# Altium PCB PCB1.PcbDoc (part 2 of 2)
Units mm, origin at the board's own origin, x right, y up, seen from the top; angles counter-clockwise.
Board outline 158 x 54 mm, 2 copper layers (Top Layer, Bottom Layer); 125 components, 171 nets, 620 pads, 107 vias.
Unrouted connection lines stored in the file: 178.
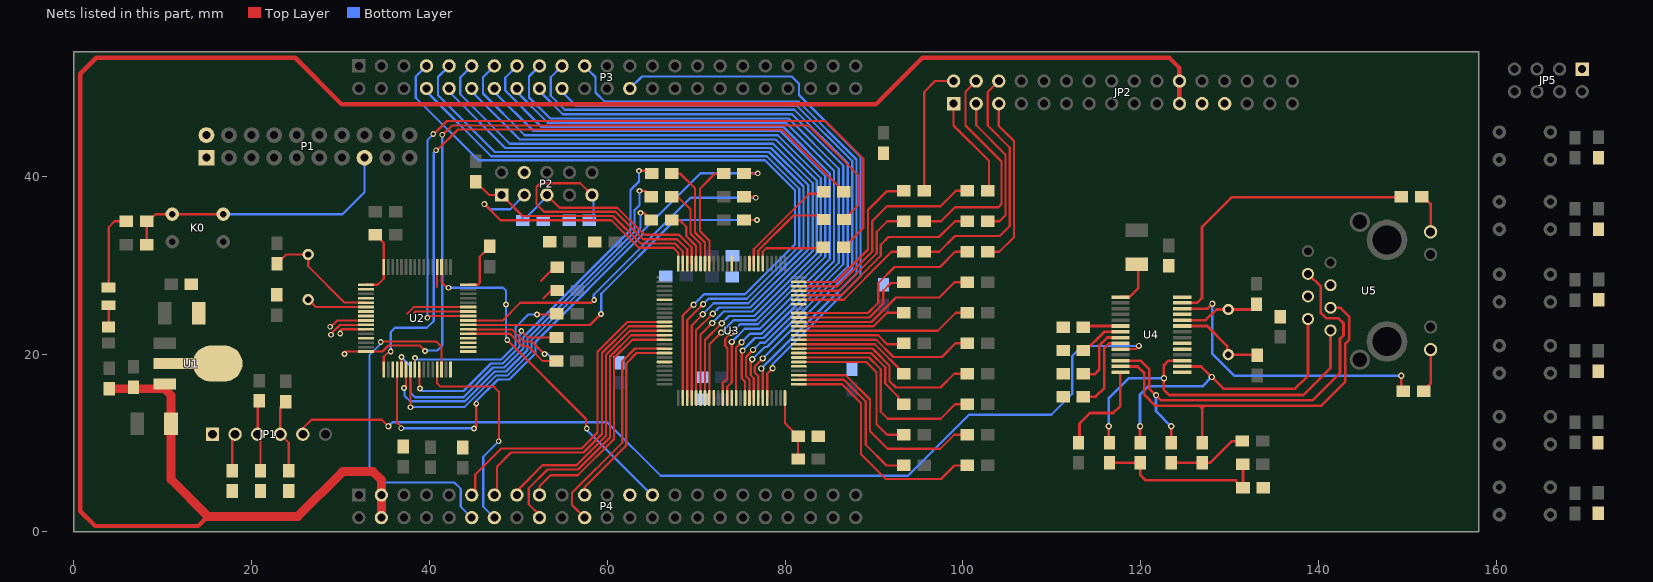
[diagram p2: the nets of this part, all layers, seen from the top]

## Via types
v1: diameter 0.7, hole 0.4, Top Layer to Bottom Layer, 59 vias
v2: diameter 0.65, hole 0.35, Top Layer to Bottom Layer, 48 vias

## Nets (pads, with @x,y where several pads share a name; then routed paths per layer and width w, separated by ;. In a path a pad name is that pad's centre, name@x,y a point inside that pad or via, vN(x,y) a via of type N, cw(c..) or ccw(c..) an arc to the next point about the centre after c; other vN are vias at no path point) (continued)
LCD_DATA14: JP2.5 R50.1 | length 18.6
  Top Layer w0.254: 103.576,31.495 104.085,31.495 105.73,33.14 105.73,43.95 104.03,45.65 JP2.5@104.03,48.155
LCD_DATA15: JP2.6 R51.1 | length 28.7
  Top Layer w0.254: R51.1@95.646,31.495 97.345,31.495 99.11,33.26 104.14,33.26 105.27,34.39 105.27,43.21 102.79,45.69 102.79,49.455 JP2.6@104.03,50.695
LCD_DE: JP2.3 R52.1 | length 15.4
  Top Layer w0.254: JP2.3@101.49,48.155 101.49,45.73 104.8,42.42 104.8,35.61 104.116,34.926 103.576,34.926
LCD_HSYNC: JP2.4 R53.1 | length 25.5
  Top Layer w0.254: R53.1@95.646,34.926 97.526,34.926 99.12,36.52 103.99,36.52 104.34,36.87 104.34,41.65 100.29,45.7 100.29,49.495 JP2.4@101.49,50.695
LCD_PLCK: JP2.1 R54.1 | length 11.4
  Top Layer w0.254: JP2.1@98.95,48.155 98.95,45.71 102.92,41.74 R54.1@102.92,38.358
LCD_VSYNC: JP2.2 R55.1 | length 14.9
  Top Layer w0.254: R55.1@95.646,38.358 95.646,49.476 96.865,50.695 JP2.2@98.95,50.695
NetC8_1: C8.1 U2.6 Y1.1 | length 7.6
  Top Layer w0.25: 27.21,25.28 U2.6@32.87,25.28
  Top Layer w0.254: C8.1@22.84,26.67 C8.1@23.39,26.12 ; Y1.1@26.37,26.12 27.21,25.28
NetC11_2: C11.2 U2.5 Y1.2 | length 13.5
  Top Layer w0.24: 26.37,29.86 30.45,25.78 U2.5@32.87,25.78
  Top Layer w0.254: C11.2@22.87,30.164 23.906,31.2 Y1.2@26.37,31.2 26.37,29.86
NetC13_1: C13.1 U4.1 | length 5.2
  Top Layer w0.3: U4.1@117.705,26.405 118.725,26.405 119.71,27.39 119.71,29.959 C13.1@119.565,30.105
NetC14_1: C14.1 U4.24 Y2.1 | length 9.1
  Top Layer w0.3: U4.24@124.655,23.805 127.295,23.805 128.5,25.01 132.41,25.01 C14.1@133.01,25.61
NetC15_1: C15.1 U4.23 Y2.2 | length 10.5
  Top Layer w0.3: U4.23@124.43,23.11 124.475,23.155 127.475,23.155 129.72,20.91 129.72,20.05 Y2.2@129.84,19.93 133.03,19.93 C15.1@133.09,19.87
NetC25_2: C25.2 L1.2 R38.1 R39.1 | length 19.6
  Top Layer w0.3: R38.1@116.473,7.758 R39.1@119.948,7.758 119.948,6.402 120.56,5.79 130.673,5.79 L1.2@131.496,4.968 131.496,7.548 C25.2@131.454,7.59
NetC26_2: C26.2 R40.1 R41.1 | length 9
  Top Layer w0.3: R41.1@123.423,7.758 126.658,7.758 126.67,7.77 127.8,7.77 130.24,10.21 C26.2@131.424,10.21
NetJP1_2: JP1.2 R14.1 | length 4.2
  Top Layer w0.254: R14.1@17.832,6.882 17.832,10.662 JP1.2@18.15,10.98
NetLED1_1: LED1.1 R67.1 | length 2.5
  Top Layer w0.3: LED1.1@3.91,23.04 3.93,23.06 R67.1@3.93,25.49
NetR5_1: R5.1 U2.36 | length 0.1
  Top Layer w0.254: R5.1@111.013,20.337 R5.1@111.06,20.29
NetR6_1: R6.1 U2.35 | length 0.1
  Top Layer w0.254: R6.1@111.186,22.94 R6.1@111.258,23.012
NetR7_2: R7.2 U2.16 | length 90.9
  Top Layer w0.24: v2(30.46,20.01) 30.369,20.101 30.549,20.28 U2.16@32.87,20.28 34.73,20.28 35.41,20.96 38.91,20.96 v2(39.52,20.35) ; v2@41.48,44.63 42.557,45.707 82.623,45.707 88.28,40.05 88.28,36.783 R7.2@86.624,35.127
  Bottom Layer w0.24: v2@39.52,20.41 40.91,20.41 41.45,20.95 v2(41.45,44.66)
NetR8_1: R8.1 U2.34 | length 0.1
  Top Layer w0.254: R8.1@111.209,17.733 R8.1@111.258,17.782
NetR9_2: R9.2 U2.17 | length 79.1
  Top Layer w0.254: U2.17@34.87,18.28 34.87,19.69 35.55,20.37 35.58,20.37 v2(35.66,20.29) ; v2(40.76,42.91) 40.76,42.88 40.83,42.88 43.21,45.26 79.617,45.26 R9.2@86.614,38.262
  Bottom Layer w0.254: v2@35.64,20.31 v2(35.66,20.29) 35.66,22.48 36.13,22.95 39.71,22.95 40.48,23.72 40.48,42.63 v2(40.76,42.91)
NetR10_1: R10.1 U2.33 | length 0.1
  Top Layer w0.254: R10.1@111.196,15.13 R10.1@111.258,15.192
NetR11_2: R11.2 U2.20 | length 63.2
  Top Layer w0.254: U2.20@36.37,18.28 36.37,12.29 v2@36.824,11.836 ; v2@45.236,11.836 45.28,11.88 v2(45.28,14.42) ; R11.2@75.868,39.81 R11.2@75.38,40.298 76.942,40.298 v2(76.92,40.32)
  Bottom Layer w0.254: v2(36.83,11.65) v2@45,11.65 ; v2@45.27,14.42 v2(45.28,14.42) 45.28,14.718 47.711,17.149 48.98,17.149 51.921,20.09 51.921,21.359 63.947,33.385 63.947,33.767 70.5,40.32 v2(76.92,40.32)
  other v2: 45.02,11.63
NetR15_2: R15.2 U2.21 | length 48
  Top Layer w0.24: U2.21@36.87,18.28 v2@36.87,19.66
  Top Layer w0.254: v2(63.57,40.6) 64.683,40.6 R15.2@64.986,40.298 R15.2@64.818,40.298
  Bottom Layer w0.254: v2(36.85,19.66) 37.87,18.64 37.87,15.647 38.38,15.137 43.773,15.137 ; 43.824,15.148 47.159,18.483 48.427,18.483 50.587,20.643 50.587,21.911 62.613,33.937 62.613,38.433 63.57,39.39 v2(63.57,40.6)
NetR16_2: R16.2 U2.22 | length 44.4
  Top Layer w0.24: v2(37.16,16.17) 37.37,16.38 U2.22@37.37,18.28 ; v2(63.62,38.35) 64.303,38.35 R16.2@64.966,37.688
  Top Layer w0.254: R16.2@64.49,37.3 R16.2@64.78,37.59
  Bottom Layer w0.24: v2@37.21,15.96 37.21,15.32 37.84,14.69 43.993,14.69 ; 44.013,14.705 47.344,18.036 48.613,18.036 51.034,20.457 51.034,21.726 63.06,33.752 63.06,36.16 63.62,36.72 v2(63.62,38.35)
NetR17_2: R17.2 U2.23 | length 42.4
  Top Layer w0.24: v2@37.87,14.336 U2.23@37.87,18.28 ; v2(63.74,35.88) 64.131,35.88 R17.2@64.946,35.065
  Bottom Layer w0.24: v2(37.87,14.02) 37.91,14.06 43.99,14.06 47.526,17.596 48.795,17.596 51.474,20.275 51.474,21.544 63.5,33.57 63.5,33.952 63.74,34.192 v2(63.74,35.88)
NetR18_2: R18.2 U2.41 | length 87.1
  Top Layer w0.24: v2(39.77,24.08) 39.77,24.274 39.776,24.28 U2.41@44.37,24.28
  Top Layer w0.254: v2@40.58,44.8 41.988,46.208 84.522,46.208 88.781,41.949 88.781,34.179 R18.2@86.594,31.992
  Bottom Layer w0.24: v2(39.77,24.08) 39.77,44.06 v2(40.44,44.73)
NetR19_2: R19.2 U2.8
NetR20_2: R20.2 U2.9 | length 4
  Top Layer w0.24: v2@29.11,23.22 29.67,23.78 U2.9@32.87,23.78
  other v2: 28.84,23.07
NetR21_2: R21.2 U2.10 | length 6.7
  Top Layer w0.24: v2@29.056,22.374 29.95,23.268 29.95,23.28 U2.10@32.87,23.28 ; 52.55,28.24 54.078,29.768 R21.2@54.396,29.768
  other v2: 28.94,22.17
NetR22_2: R22.2 U2.11 | length 5.2
  Top Layer w0.254: v2(29.98,22.32) 29.98,22.63 30.13,22.78 U2.11@32.87,22.78 ; 52.84,26.27 53.718,27.148 R22.2@54.366,27.148
NetR23_2: R23.2 U2.24 | length 20.7
  Top Layer w0.24: U2.24@38.37,18.28 v2(38.37,19.572) ; v2(52.09,24.45) 54.278,24.45 R23.2@54.346,24.518
  Bottom Layer w0.24: v2(38.37,19.572) 38.572,19.37 48.06,19.37 49.7,21.01 49.7,22.338 49.695,22.343 49.695,23.015 51.13,24.45 v2(52.09,24.45)
NetR24_2: R24.2 U2.25 | length 21.7
  Top Layer w0.24: v2@38.87,16.13 U2.25@38.87,18.28 ; v2(50.34,22.61) 50.31,22.61 51.072,21.848 R24.2@54.296,21.848
  Bottom Layer w0.24: v2(38.94,16.13) 39.23,15.84 43.84,15.84 46.93,18.93 48.242,18.93 50.14,20.828 50.14,22.14 50.34,22.34 v2(50.34,22.61)
NetR25_2: R25.2 U2.37 | length 10.6
  Top Layer w0.24: U2.37@44.37,22.28 44.373,22.277 49.062,22.277 50.443,20.896 51.045,20.896 52.734,19.208 R25.2@53.7,19.208
NetR26_2: R26.2 U2.38 | length 11.6
  Top Layer w0.24: U2.38@44.37,22.78 44.376,22.774 47.425,22.774 47.428,22.771 49.267,22.771 50.648,21.39 51.54,21.39 v2(52.93,20)
  Bottom Layer w0.254: v2(52.93,20) 52.93,20.05 52.88,20.1 53.22,20.1 54.108,19.212 R26.2@54.296,19.212
NetR27_2: R27.2 U2.39 | length 40.1
  Top Layer w0.24: U2.39@44.37,23.28 U2.39@44.37,23.28 47.628,23.279 47.635,23.272
  Top Layer w0.254: 47.635,23.272 58.052,23.272 v2(59.29,24.51) ; R27.2@75.38,35.065 v2(76.835,35.065)
  Bottom Layer w0.254: v2@59.34,24.51 59.34,26.78 67.625,35.065 v2(76.835,35.065)
NetR28_2: R28.2 U2.40 | length 40.3
  Top Layer w0.24: U2.40@44.37,23.78 46.47,23.78
  Top Layer w0.254: 46.47,23.78 48.25,23.78 50.232,25.762 58.202,25.762 v2(58.53,26.09) ; R28.2@75.792,38.1 R28.2@75.38,37.688 76.582,37.688 v2(76.7,37.57)
  Bottom Layer w0.254: v2@58.47,26.15 58.47,26.678 69.362,37.57 v2(76.7,37.57)
NetR29_1: R29.1 U4.27 | length 34.3
  Top Layer w0.3: U4.27@124.655,25.755 126.345,25.755 126.88,26.29 126.88,34.31 130.19,37.62 149.226,37.62 R29.1@149.308,37.702
NetR29_2: R29.2 U5.12 | length 4.1
  Top Layer w0.3: R29.2@151.93,37.53 152.59,36.87 U5.12@152.59,33.745
NetR30_1: R30.1 U4.26 | length 33.4
  Top Layer w0.3: U4.26@124.655,25.105 127.505,25.105 v1(128.05,25.65) ; R30.1@149.13,15.73 149.3,15.9 v1(149.3,17.55)
  Bottom Layer w0.3: v1(128.05,25.65) 128.05,20.02 130.52,17.55 v1(149.3,17.55)
NetR30_2: R30.2 U5.9 | length 5.3
  Top Layer w0.3: R30.2@151.46,15.79 151.72,15.79 152.59,16.66 U5.9@152.59,20.495
NetR31_2: R31.2 U4.14 | length 11.9
  Top Layer w0.3: R31.2@113.29,9.61 113.1,9.8 113.1,12.19 114.27,13.36 116.89,13.36 117.705,14.175 U4.14@117.705,17.955
NetR32_2: R32.2 U3.76 | length 27.3
  Top Layer w0.254: U3.76@81.54,16.61 86.4,16.61 88.55,14.46 88.55,8.74 91.33,5.96 97.52,5.96 99.038,7.478 R32.2@100.49,7.478
NetR33_2: R33.2 U3.77 | length 18.7
  Top Layer w0.254: U3.77@81.54,17.11 86.62,17.11 89.07,14.66 89.07,9.81 91.402,7.478 R33.2@93.36,7.478
NetR34_2: R34.2 U3.78 | length 25.1
  Top Layer w0.254: U3.78@81.54,17.61 86.83,17.61 89.55,14.89 89.55,11.32 91.51,9.36 97.46,9.36 99.009,10.909 R34.2@100.49,10.909
NetR35_2: R35.2 U3.81 | length 18.6
  Top Layer w0.254: U3.81@81.54,19.11 89.12,19.11 90.29,17.94 90.29,12.09 91.471,10.909 R35.2@93.36,10.909
NetR36_2: R36.2 U3.82 | length 25.3
  Top Layer w0.254: U3.82@81.54,19.61 89.45,19.61 90.77,18.29 90.77,13.5 91.54,12.73 97.51,12.73 99.12,14.34 R36.2@100.49,14.34
NetR37_2: R37.2 U3.83 | length 15.1
  Top Layer w0.254: U3.83@81.54,20.11 89.67,20.11 91.27,18.51 91.27,16.68 92.74,15.21 R37.2@92.74,14.53 ; R37.2@93.252,14.34 R37.2@93.36,14.34
NetR38_2: R38.2 U4.17 U5.1 | length 41.6
  Top Layer w0.3: v1(116.41,11.87) 116.41,10.107 R38.2@116.473,10.044 ; U4.17@124.655,19.255 123.115,19.255 122.6,18.74 122.6,15.98 123.19,15.39 138.29,15.39 141.34,18.44 U5.1@141.34,22.66
  Bottom Layer w0.3: v1(116.41,11.87) 116.41,15.05 118.63,17.27 v1(122.61,17.27)
NetR39_2: R39.2 U4.16 U5.2 | length 36.5
  Top Layer w0.3: v1(119.915,11.87) 119.915,10.077 R39.2@119.948,10.044 ; U4.16@124.655,18.605 126.785,18.605 129.29,16.1 137.35,16.1 138.8,17.55 U5.2@138.8,23.94
  Bottom Layer w0.3: v1(119.915,11.87) 119.915,15.455 120.83,16.37 126.921,16.37 v1(127.97,17.42)
NetR40_2: R40.2 U4.13 U5.3 | length 44.3
  Top Layer w0.3: U4.13@117.705,18.605 119.655,18.605 120.39,17.87 120.39,15.44 121.66,14.17 140.27,14.17 142.98,16.88 142.98,21.14 143.46,21.62 143.46,24.19 142.45,25.2 U5.3@141.34,25.2 ; 126.64,14.14 126.898,13.882 ; R40.2@126.898,10.044 126.898,13.882 ; 127.155,14.14 126.898,13.882
NetR41_2: R41.2 U4.12 U5.6 | length 48.9
  Top Layer w0.3: U4.12@117.705,19.255 119.965,19.255 120.97,18.25 120.97,16.09 122.27,14.79 139.3,14.79 142.4,17.89 142.4,21.72 142.79,22.11 142.79,23.46 142.24,24.01 140.86,24.01 140.25,24.62 140.25,27.57 U5.6@138.8,29.02 ; v1(123.42,11.87) 123.42,10.047 R41.2@123.423,10.044
  Bottom Layer w0.3: v1(121.72,15.38) 121.72,13.57 v1(123.42,11.87)
NetR42_2: R42.2 U3.84 | length 22.4
  Top Layer w0.254: U3.84@81.54,20.61 89.83,20.61 91.75,18.69 91.75,16.94 92.46,16.23 97.48,16.23 99.021,17.771 R42.2@100.49,17.771
NetR43_2: R43.2 U3.85 | length 13.2
  Top Layer w0.254: U3.85@81.54,21.11 90.07,21.11 93.36,17.82 R43.2@93.36,17.771
NetR44_2: R44.2 U3.86 | length 20.4
  Top Layer w0.254: U3.86@81.54,21.61 90.26,21.61 92.2,19.67 97.64,19.67 99.172,21.202 R44.2@100.49,21.202
NetR45_2: R45.2 U3.87 | length 12.3
  Top Layer w0.254: U3.87@81.54,22.11 90.47,22.11 91.47,21.11 93.268,21.11 R45.2@93.36,21.202
NetR46_2: R46.2 U3.88 | length 19.8
  Top Layer w0.254: U3.88@81.54,22.61 97.16,22.61 99.183,24.633 R46.2@100.49,24.633
NetR47_2: R47.2 U3.89 | length 12.5
  Top Layer w0.254: U3.89@81.54,23.11 89.94,23.11 91.463,24.633 R47.2@93.36,24.633
NetR48_2: R48.2 U3.90 | length 20.8
  Top Layer w0.254: U3.90@81.54,23.61 89.71,23.61 92.47,26.37 97.35,26.37 99.044,28.064 R48.2@100.49,28.064
NetR49_2: R49.2 U3.91 | length 14.4
  Top Layer w0.254: U3.91@81.54,24.11 89.49,24.11 91.05,25.67 91.05,27.11 91.92,27.98 93.36,27.98 R49.2@93.36,28.064
NetR50_2: R50.2 U3.92 | length 23.1
  Top Layer w0.254: U3.92@81.54,24.61 89.32,24.61 90.47,25.76 90.47,27.97 92.3,29.8 97.41,29.8 99.105,31.495 R50.2@100.49,31.495
NetR51_2: R51.2 U3.95 | length 14.1
  Top Layer w0.254: U3.95@81.54,26.11 86.59,26.11 91.27,30.79 91.975,31.495 R51.2@93.36,31.495
NetR52_2: R52.2 U3.96 | length 23.1
  Top Layer w0.254: U3.96@81.54,26.61 86.34,26.61 90.77,31.04 90.77,32.28 91.64,33.15 97.32,33.15 99.096,34.926 R52.2@100.49,34.926
NetR53_2: R53.2 U3.97 | length 16.5
  Top Layer w0.254: U3.97@81.54,27.11 86.1,27.11 90.31,31.32 90.31,33.76 91.476,34.926 R53.2@93.36,34.926
NetR54_2: R54.2 U3.98 | length 25.4
  Top Layer w0.254: U3.98@81.54,27.61 85.9,27.61 89.81,31.52 89.81,34.97 91.45,36.61 97.48,36.61 99.228,38.358 R54.2@100.49,38.358
NetR55_2: R55.2 U3.99 | length 18.7
  Top Layer w0.254: U3.99@81.54,28.11 85.68,28.11 89.33,31.76 89.33,36.2 91.45,38.32 93.322,38.32 R55.2@93.36,38.358
NetR59_2: 
NRST: C7.2 JP1.5 K0.2 K0.3 P1.15 R2.2 U2.7 U4.10 | length 142.2
  Top Layer w0.254: R2.2@8.18,34.71 9.2,35.73 K0.3@11.081,35.73 K0.2@16.821,35.73 ; R2.2@8.204,34.932 8.204,32.302 C7.2@8.206,32.3 ; JP1.5@25.77,10.98 25.77,11.65 26.74,12.62 34.64,12.62 v1(35.39,11.87) ; U4.10@117.705,20.555 119.435,20.555 v1(119.79,20.91)
  Bottom Layer w0.254: K0.2@16.821,35.73 30.23,35.73 32.705,38.205 P1.15@32.705,42.08 ; JP1.5@25.61,10.82 JP1.5@26.23,11.44 ; v1(35.39,11.87) 35.86,12.34 59.98,12.34 66.01,6.31 93.81,6.31 100.67,13.17 109.93,13.17 112.304,15.544 112.304,19.774 113.44,20.91 v1(119.79,20.91)
OUT_C\S\: R18.1 U3.6 | length 8.4
  Top Layer w0.254: U3.6@77.49,30.16 77.49,31.496 77.884,31.89 84.206,31.89 R18.1@84.308,31.992
OUT_C\S\-O: P4.15 U3.38 | length 29.9
  Top Layer w0.254: P4.15@49.84,4.144 49.84,4.61 52.73,7.5 56.554,7.5 59.86,10.806 59.86,19.922 62.548,22.61 U3.38@66.44,22.61
PA0: P3.14 U3.61 | length 72.6
  Top Layer w0.254: U3.61@72.99,15.06 72.99,16.74 73.52,17.27 73.52,20.66 73.28,20.9 73.28,21.71 v1(73.95,22.38)
  Bottom Layer w0.254: P3.14@47.3,49.86 47.3,49.48 51.71,45.07 79.45,45.07 84.52,40 84.52,30.93 76.94,23.35 74.92,23.35 v1(73.95,22.38)
PA1: P3.13 U3.58 | length 76.9
  Top Layer w0.254: U3.58@71.49,15.06 71.49,21.09 v1(72.81,22.41)
  Bottom Layer w0.254: P3.13@47.3,52.4 46.03,51.13 46.03,49.31 50.73,44.61 79.17,44.61 84.02,39.76 84.02,31.1 76.73,23.81 74.21,23.81 v1(72.81,22.41)
PA2: P3.12 U3.57 | length 74.6
  Top Layer w0.254: U3.57@70.99,15.06 70.99,21.58 v1(72.87,23.46)
  Bottom Layer w0.254: P3.12@44.76,49.86 44.76,49.53 50.16,44.13 78.95,44.13 83.56,39.52 83.56,31.31 76.54,24.29 73.7,24.29 v1(72.87,23.46)
PA3: P3.11 U3.56 | length 78.7
  Top Layer w0.254: U3.56@70.49,15.06 70.49,22.17 v1(71.8,23.48)
  Bottom Layer w0.254: P3.11@44.76,52.4 43.46,51.1 43.46,49.22 49.03,43.65 78.65,43.65 83.1,39.2 83.1,31.58 76.3,24.78 73.1,24.78 v1(71.8,23.48)
PA4: P3.10 U3.55 | length 76.3
  Top Layer w0.254: U3.55@69.99,15.06 69.99,22.66 v1(71.86,24.53)
  Bottom Layer w0.254: P3.10@42.22,49.86 42.22,49.49 48.53,43.18 78.42,43.18 82.6,39 82.6,31.75 76.09,25.24 72.57,25.24 v1(71.86,24.53)
PA5: P3.9 U3.54 | length 80.4
  Top Layer w0.254: U3.54@69.49,15.06 69.49,23.22 v1(70.74,24.47)
  Bottom Layer w0.254: P3.9@42.22,52.4 40.98,51.16 40.98,49.1 47.36,42.72 78.18,42.72 82.07,38.83 82.07,31.93 75.86,25.72 71.99,25.72 v1(70.74,24.47)
PA6: P3.8 U3.53 | length 78.1
  Top Layer w0.254: U3.53@68.99,15.06 68.99,23.82 v1(70.78,25.61)
  Bottom Layer w0.254: P3.8@39.68,49.86 39.68,49.52 46.96,42.24 77.95,42.24 81.59,38.6 81.59,32.11 75.69,26.21 71.38,26.21 v1(70.78,25.61)
PA7: P3.7 U3.52 | length 82.3
  Top Layer w0.254: U3.52@68.49,15.06 68.49,24.32 v1(69.71,25.54)
  Bottom Layer w0.254: P3.7@39.68,52.4 38.48,51.2 38.48,48.81 45.51,41.78 77.74,41.78 81.11,38.41 81.11,32.34 75.49,26.72 70.89,26.72 v1(69.71,25.54)
PB0: P3.15 U3.62 | length 74.4
  Top Layer w0.254: U3.62@73.49,15.06 73.49,16.31 73.99,16.81 v1(73.99,21.36)
  Bottom Layer w0.254: P3.15@49.84,52.4 48.52,51.08 48.52,49.63 52.62,45.53 79.81,45.53 85.03,40.31 85.03,30.69 77.19,22.85 75.47,22.85 v1@74.19,21.57
PB1: P3.16 U3.64 | length 70.6
  Top Layer w0.254: U3.64@74.49,15.06 74.49,20.71 v1(75.11,21.33)
  Bottom Layer w0.254: P3.16@49.84,49.86 49.84,49.46 53.3,46 80.11,46 85.51,40.6 85.51,30.44 77.35,22.28 76.06,22.28 v1(75.11,21.33)
PB2: P3.17 U3.66 | length 73.2
  Top Layer w0.254: v1(75.22,20.39) 75.14,20.31 75.14,17.26 75.49,16.91 U3.66@75.49,15.06
  Bottom Layer w0.254: P3.17@52.38,52.4 51.2,51.22 51.2,48.86 53.58,46.48 80.4,46.48 86.03,40.85 86.03,30.26 77.57,21.8 76.63,21.8 v1(75.22,20.39)
PB3: P3.18 U3.67 | length 69
  Top Layer w0.254: U3.67@75.99,15.06 75.99,17.1 75.594,17.496 75.594,19.664 v1(76.39,20.46)
  Bottom Layer w0.254: P3.18@52.38,49.86 52.38,49.59 55.01,46.96 80.77,46.96 86.54,41.19 86.54,30.09 77.73,21.28 77.21,21.28 v1(76.39,20.46)
PB4: P3.19 U3.68 | length 71.6
  Top Layer w0.254: v1(76.32,19.41) 76.14,19.23 76.14,17.62 76.49,17.27 U3.68@76.49,15.06
  Bottom Layer w0.254: P3.19@54.92,52.4 53.65,51.13 53.65,49.05 54.66,48.04 55.23,47.47 81.04,47.47 87.04,41.47 87.04,29.87 77.96,20.79 77.7,20.79 v1(76.32,19.41)
PB5: P3.20 U3.69 | length 67.6
  Top Layer w0.254: U3.69@76.99,15.06 76.99,17.52 76.594,17.916 76.594,18.604 v1(77.5,19.51)
  Bottom Layer w0.254: P3.20@54.92,49.86 54.92,49.5 56.496,47.924 81.316,47.924 87.54,41.7 87.54,29.55 78.29,20.3 78.29,20.28 ; v1(77.5,19.51) 78.28,20.29
PB6: P3.21 U3.70 | length 66.5
  Top Layer w0.254: v1(77.33,18.37) 77.49,18.21 U3.70@77.49,15.06
  Bottom Layer w0.254: 58.01,51.81 58.68,51.14 58.68,49.42 59.722,48.378 81.532,48.378 88.03,41.88 88.03,29.06 78.76,19.79 78.75,19.79 v1(77.33,18.37)
PB7: P3.26 U3.71 | length 62.5
  Top Layer w0.254: U3.71@77.99,15.06 77.99,17.8 v1(78.6,18.41)
  Bottom Layer w0.254: P3.26@62.54,49.86 63.9,51.22 80.74,51.22 81.56,50.4 81.56,49.13 88.49,42.2 88.49,28.75 78.615,18.875 v1@78.615,18.395
R\S\T\: U2.4
RST_N: C28.2 R56.1 U2.2 U3.75 | length 7.5
  Top Layer w0.254: U3.75@79.99,15.06 79.99,12.211 R56.1@81.458,10.742 C28.2@81.458,8.2
SPI1-MISO: R16.1 U3.20 | length 9.3
  Top Layer w0.254: R16.1@67.252,37.688 67.942,37.688 69.36,36.27 69.36,33.52 70.49,32.39 U3.20@70.49,30.16
SPI1-MISO-O: P4.21 U3.43 | length 21.5
  Top Layer w0.254: P4.21@57.46,4.144 57.46,5.04 62.13,9.71 62.13,18.94 63.3,20.11 U3.43@66.44,20.11
SPI1-MOSI: R17.1 U3.21 | length 6.6
  Top Layer w0.254: R17.1@67.232,35.065 68.115,35.065 68.88,34.3 68.88,33.26 69.99,32.15 U3.21@69.99,30.16
SPI1-MOSI-O: P4.18 U3.39 | length 31.5
  Top Layer w0.254: P4.18@52.38,1.604 52.38,1.9 51.16,3.12 51.16,4.9 53.28,7.02 56.716,7.02 60.314,10.618 60.314,19.734 62.69,22.11 U3.39@66.44,22.11
SPI1-NSS: R11.1 U3.18 | length 12.3
  Top Layer w0.254: U3.18@71.49,30.16 71.49,32.74 70.42,33.81 70.42,38.59 72.128,40.298 R11.1@73.094,40.298
SPI1-NSS-O: P4.17 U3.40 | length 27.2
  Top Layer w0.254: P4.17@52.38,4.144 52.38,5.12 53.62,6.36 56.698,6.36 60.768,10.43 60.768,19.546 62.832,21.61 U3.40@66.44,21.61
SPI1-SCK: R15.1 U3.19 | length 12.2
  Top Layer w0.254: R15.1@67.272,40.298 68.192,40.298 69.86,38.63 69.86,33.68 70.99,32.55 U3.19@70.99,30.16
SPI1-SCK-O: P4.22 U3.42 | length 25.8
  Top Layer w0.254: P4.22@57.46,1.604 56.05,3.014 56.05,4.41 61.676,10.036 61.676,19.17 63.116,20.61 U3.42@66.44,20.61
SPI2-MISO: R6.2 U4.6 | length 4.2
  Top Layer w0.3: R6.2@113.544,23.155 U4.6@117.705,23.155
SPI2-MOSI: R5.2 U4.7 | length 4.8
  Top Layer w0.3: R5.2@113.78,20.36 113.78,20.38 115.905,22.505 U4.7@117.705,22.505
SPI2-NSS: R10.2 U4.9 | length 9.5
  Top Layer w0.3: R10.2@113.324,15.192 113.332,15.2 114.92,15.2 115.91,16.19 115.91,20.67 116.445,21.205 U4.9@117.705,21.205
SPI2-SCK: R8.2 U4.8 | length 7.5
  Top Layer w0.3: R8.2@113.544,17.782 113.617,17.71 114.78,17.71 115.33,18.26 115.33,20.94 116.245,21.855 U4.8@117.705,21.855
TCK: P2.1 R60.2 U3.24 | length 27.9
  Top Layer w0.254: R60.2@45.222,39.386 46.728,37.88 P2.1@48.13,37.88 50.48,35.53 60.66,35.53 63.76,32.43 67.61,32.43 68.49,31.55 U3.24@68.49,30.16
TDI: P2.9 R58.1 U3.23 | length 32.5
  Top Layer w0.254: P2.9@58.29,37.88 56.96,39.21 52.48,39.21 52.05,38.78 52.05,36.84 52.9,35.99 60.94,35.99 64.01,32.92 67.85,32.92 68.99,31.78 U3.23@68.99,30.16
  Bottom Layer w0.254: P2.9@58.29,37.88 58.462,37.708 R58.1@58.462,35.042
TDO: P2.3 U3.25 | length 30.7
  Top Layer w0.254: v1(46.19,36.86) 48,35.05 60.46,35.05 63.57,31.94 67.45,31.94 67.99,31.4 U3.25@67.99,30.16
  Bottom Layer w0.254: v1(46.19,36.86) 46.76,36.29 49.08,36.29 P2.3@50.67,37.88
TMS: P2.5 R57.1 U3.22 | length 24.3
  Top Layer w0.254: P2.5@53.21,37.88 54.63,36.46 61.14,36.46 64.19,33.41 68.06,33.41 69.49,31.98 U3.22@69.49,30.16
  Bottom Layer w0.254: R57.1@50.498,35.028 R57.1@50.498,35.448 ; R57.1@50.968,35.448 53.21,37.69 P2.5@53.21,37.88
UART1_RX: C10.2 JP1.3 R13.1 U2.43 | length 15.2
  Top Layer w0.24: 37.5,24.54 38.24,25.28 U2.43@44.37,25.28
  Top Layer w0.254: C10.2@20.88,14.734 20.69,14.544 JP1.3@20.69,10.98 21.007,10.663 R13.1@21.007,6.882
UART1_TX: C9.2 JP1.4 R12.1 U2.42 | length 14.6
  Top Layer w0.24: 38.264,24.606 38.439,24.78 U2.42@44.37,24.78
  Top Layer w0.254: C9.2@23.85,14.654 23.23,14.034 JP1.4@23.23,10.98 24.182,10.028 R12.1@24.182,6.882
UART2_RX: R9.1 U3.8 | length 12.2
  Top Layer w0.254: U3.8@76.49,30.16 76.49,31.78 82.73,38.02 84.086,38.02 R9.1@84.328,38.262 ; R9.1@84.18,38.38 R9.1@84.18,38.42
UART2_RX-O: P4.11 U3.36 | length 36.4
  Top Layer w0.254: P4.11@44.82,3.91 45.15,4.24 45.15,6.46 48.08,9.39 57.12,9.39 58.9,11.17 58.9,20.246 62.264,23.61 U3.36@66.44,23.61
UART2_TX: R7.1 U3.7 | length 10.7
  Top Layer w0.254: U3.7@76.99,30.16 76.99,31.638 80.942,35.59 83.876,35.59 R7.1@84.338,35.127
UART2_TX-O: P4.13 U3.37 | length 34
  Top Layer w0.254: P4.13@47.06,4.24 47.6,4.78 47.6,7.33 49.19,8.92 57.332,8.92 59.406,10.994 59.406,20.11 62.406,23.11 U3.37@66.44,23.11
UART3_RX: P4.12 U2.30 | length 39.2
  Top Layer w0.24: v2(34.53,21.36) 34.57,21.4 40.8,21.4 41.37,20.83 U2.30@41.37,18.28 U2.30@41.4,18.25
  Bottom Layer w0.24: v2@34.63,21.26 33.28,19.91 33.28,7.29 35.03,5.54 42.82,5.54 43.524,4.836 43.524,2.84 P4.12@44.76,1.604
UART3_TX: P4.14 U2.29 | length 24.3
  Top Layer w0.24: U2.29@40.87,18.28 40.87,16.696 41.229,16.337 47.233,16.337 47.816,15.754 47.816,10.216 v2(47.79,10.19)
  Bottom Layer w0.24: P4.14@47.3,1.604 46.06,2.844 46.06,8.46 v2(47.79,10.19)
UART4_RX: P4.25 U2.52 | length 2.2
  Top Layer w0.24: 40.87,27.55 U2.52@40.87,29.78
UART4_TX: P4.27 U2.51 | length 39.5
  Top Layer w0.24: U2.51@41.37,29.78 41.37,28.07 41.99,27.45 41.99,27.42 42.03,27.46 v2(42.15,27.46) ; v2@48.82,21.64 v2(48.75,21.57) 57.62,12.7 57.62,11.71 v2(57.7,11.63)
  Bottom Layer w0.24: v2(42.15,27.46) 48.29,27.46 48.63,27.12 v2(48.63,25.58) 48.63,21.52 48.68,21.57 v2(48.75,21.57) ; v2(57.7,11.63) 57.7,11.45 65.006,4.144 P4.27@65.08,4.144
VCC3V3: C1.1 C3.1 C4.1 C5.1 C6.1 C12.1 C16.2 C17.2 C18.2 C19.2 C20.2 C21.2 C22.2 C23.2 C24.1 C27.2 CA1.1 JP1.1 JP2.23 JP2.25 JP5.1 L1.1 P1.1 P1.2 P2.4 R2.1 R12.2 R13.2 R14.2 R56.2 R57.2 R58.2 R61.2 R62.2 R63.2 R64.2 R65.2 R66.2 R67.2 U1.2 U2.1 U2.13 U2.19 U2.32 U2.48 U2.64 U3.9 U3.13 U3.31 U3.45 U3.59 U3.63 U3.80 U3.94 U4.15 U4.19 U4.20 U4.25 U4.28 U5.4 U5.5 | length 21.7
  Top Layer w0.254: R67.2@3.93,27.49 3.93,34.26 4.602,34.932 R2.1@5.918,34.932 ; U2.1@32.87,27.78 34.17,27.78 34.87,28.48 U2.64@34.87,29.78 34.87,32.48 C6.1@33.93,33.42 ; U2.48@44.37,27.78 45.46,27.78 45.66,27.98 45.66,30.93 46.15,31.42
VDD_5V: C2.1 CA2.1 JP2.21 JP2.22 P4.3 P4.4 R1.2 U1.3 | length 247.4
  Top Layer w0.5: 15.09,1.75 14,0.66 2.41,0.66 0.74,2.33 0.74,51.52 2.53,53.31 24.9,53.31 30.14,48.07 90.19,48.07 95.42,53.3 123.22,53.3 124.35,52.17 JP2.21@124.35,48.155
  Top Layer w1: R1.2@4.01,16.094 9.934,16.094 U1.3@10.5,16.66 ; U1.3@10.01,16.29 10.945,15.355 10.945,5.895 15.09,1.75 25.21,1.75 30.24,6.78 33.66,6.78 34.6,5.84 P4.4@34.6,1.604
pads on no net: P1.17 P1.19 P2.6 P2.7 P2.8 P3.3 P3.4 P3.5 P3.6 P3.22 P3.23 P3.24 P3.25 P3.27 P3.28 P3.29 P3.30 P3.31 P3.32 P3.33 P3.34 P3.35 P3.36 P3.37 P3.38 P3.39 P3.40 P3.41 P3.42 P3.43 P3.44 P3.45 P3.46 P4.5 P4.6 P4.7 P4.8 P4.9 P4.10 P4.28 P4.29 P4.30 P4.31 P4.32 P4.33 P4.34 P4.35 P4.36 P4.37 P4.38 P4.39 P4.40 P4.42 U2.3 U2.26 U2.53 U2.54 U2.57 U2.61 U2.62 U3.14 U4.3 U4.5 U5. U5.7

## Polygon pours and split planes (outlines as drawn)
GND on Bottom Layer "Top Layer-No Net" (solid, remove dead copper, shelved, pour order 1003): 158.51,0.27 173.28,0.27 173.51,0.5 173.51,53.45 173.18,53.78 158.55,53.78 158.22,53.45 158.22,0.56 158.51,0.27
GND on Bottom Layer "Top Layer-No Net" (solid, remove dead copper, shelved, pour order 1002): 0.34,0.27 157.28,0.27 157.71,0.7 157.71,53.34 157.33,53.72 0.71,53.72 0.26,53.27 0.26,0.35 0.34,0.27
GND on Top Layer "Top Layer-No Net" (solid, remove dead copper, shelved, pour order 1001): 158.39,0.24 173.08,0.24 173.58,0.74 173.58,53.3 173.15,53.73 158.67,53.73 158.29,53.35 158.29,0.34 158.39,0.24
GND on Top Layer "Top Layer-No Net" (solid, remove dead copper, shelved, pour order 1000): 0.38,0.34 157.04,0.34 157.61,0.91 157.61,53.13 157,53.74 0.94,53.74 0.3,53.1 0.3,0.42 0.38,0.34

## Keep-outs
Keep-Out Layer:
  circle w0.254: c153,49 r1.7
  circle w0.254: c5,49 r1.7
  circle w0.254: c5,5 r1.7
  circle w0.254: c153,5 r1.7
  lines w0.254: 158,0 172.18,0 173.7,0 173.7,54 158,54 ; 158,0 158,54 ; 158,0 0,0 0,54 158,54

## Silkscreen, mask and mechanical layers (free items; w line width, h text height)
Top Overlay:
  circle w0.254: c5,49 r4
  circle w0.254: c5,5 r4
  circle w0.254: c153,49 r4
  circle w0.254: c153,5 r4

## Dimensions
158,54 to 173.7,54 on Keep-Out Layer
0,54 to 158,54 on Keep-Out Layer
0,54 to 0,0 on Keep-Out Layer

## Text inside footprints (layer, text, board x,y; h text height)
JP1: Top Overlay "6" at 31.22,12.54 h1 r180; Top Overlay "1" at 13.16,10.3 h1 r180
JP2: Top Overlay "1" at 96.02,46.96 h1; Top Overlay "2" at 95.7,51.52 h1; Top Overlay "19" at 114.82,46.65 h1; Top Overlay "20" at 115.13,51.31 h1; Top Overlay "31" at 139.78,46.54 h1; Top Overlay "32" at 139.61,51.7 h1
JP5: Top Overlay "2" at 172.07,48.12 h1; Top Overlay "1" at 172.5,52 h1; Top Overlay "7" at 160.46,52.16 h1; Top Overlay "8" at 160.99,49.36 h1 r180
P2: Top Overlay "2" at 47.32,42.11 h1; Top Overlay "1" at 47.3,35.14 h1; Top Overlay "9" at 58.8,35.3 h1; Top Overlay "10" at 57.78,42.18 h1
P3: Bottom Overlay "2" at 29.52,50.368 h1 r180; Bottom Overlay "1" at 29.52,52.908 h1 r180; Bottom Overlay "46" at 89.591,50.368 h1 r180; Bottom Overlay "45" at 89.591,52.908 h1 r180
P4: Bottom Overlay "2" at 29.52,2.112 h1 r180; Bottom Overlay "1" at 29.52,4.652 h1 r180; Bottom Overlay "46" at 89.591,2.112 h1 r180; Bottom Overlay "45" at 89.591,4.652 h1 r180